# EAGLE board ZdrojII (EAGLE 4.01)
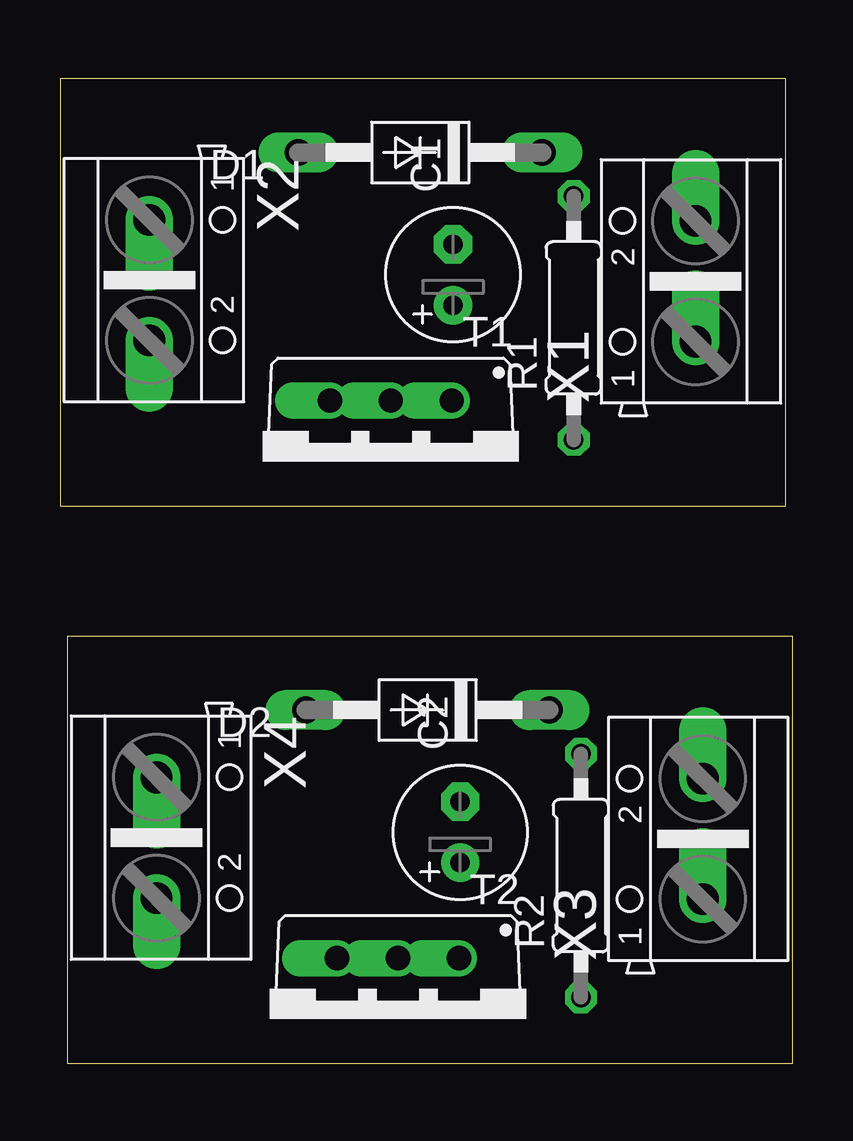
[diagram p0: board, top side]
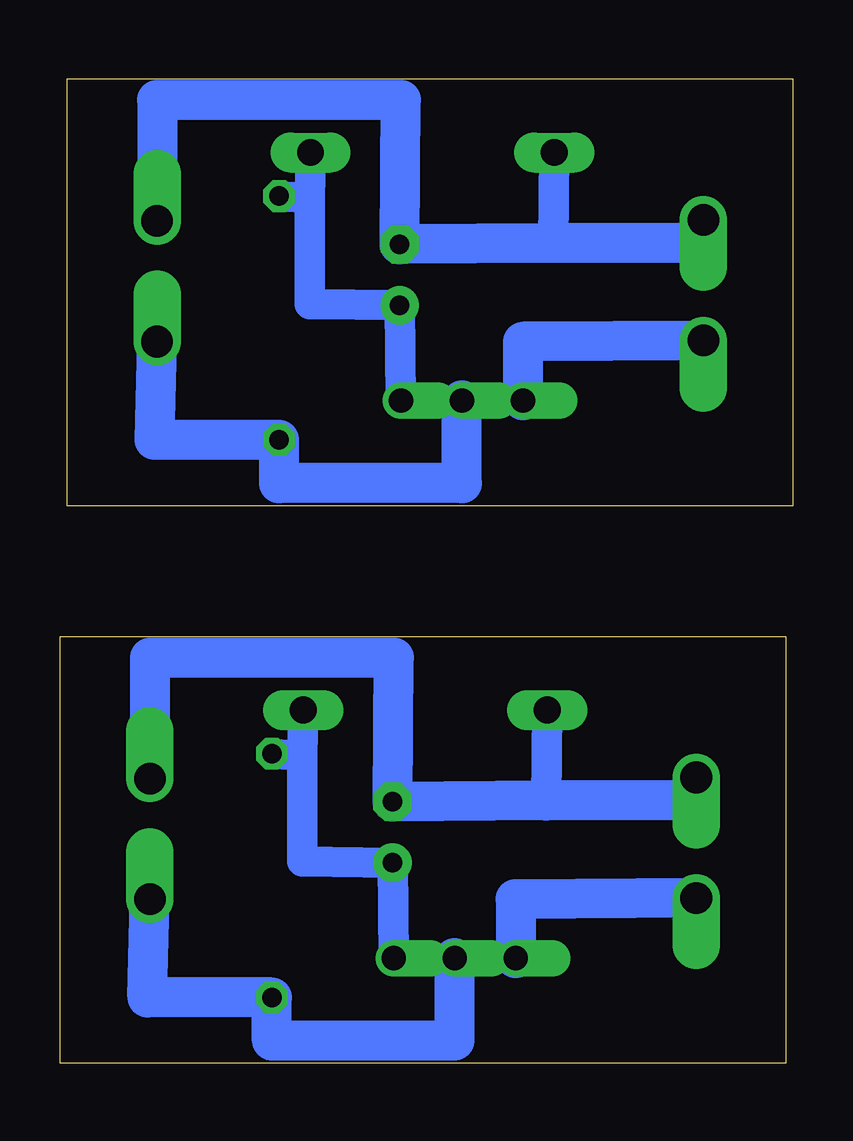
[diagram p1: board, bottom side, seen from below]

Size 30.53 x 41.05 mm. Coordinates in mm from the lower left corner, seen from the top.
Outline: 0,23.24 30.23,23.24 30.23,41.05 0,41.05 0,23.24
Outline: 0.3,0 30.53,0 30.53,17.81 0.3,17.81 0.3,0
Copper layers used: Bottom

## Footprints (pad centres in the part's own frame; a part is rotated, then mirrored left to right if it is on the bottom)
E2,5-6 = drill 0.813 pad 1.6 round: + -1.27,0 | drill 0.813 pad 1.6 octagon: - 1.27,0
DO41Z10 = drill 1.118 long: A 5.08,0; K -5.08,0
0207/10 = drill 0.813 octagon: 1 -5.08,0; 2 5.08,0
TO220V = drill 1.016 offset: 1 -2.54,-2.54; 2 0,-2.54; 3 2.54,-2.54
AK500/2 = drill 1.321 offset: 1 -2.515,0; 2 2.515,0

## Placement (x,y rotation side)
C1  [E2,5-6]  16.38,32.88 90 top
C2  [E2,5-6]  16.68,9.64 90 top
D1  BZX85  [DO41Z10]  15.01,37.98 180 top
D2  BZX85  [DO41Z10]  15.31,14.73 180 top
R1  [0207/10]  21.4,31.08 90 top
R2  [0207/10]  21.7,7.83 90 top
T1  TIP122*  [TO220V]  13.78,25.09 180 top
T2  TIP122*  [TO220V]  14.08,1.85 180 top
X1  [AK500/2]  26.48,32.6 90 top
X2  [AK500/2]  3.72,32.65 270 top
X3  [AK500/2]  26.78,9.36 90 top
X4  [AK500/2]  4.02,9.41 270 top

## Library data of the parts
C1 C2 R1 R2 = rcl
D1 D2 = diode
T1 T2 = transistor-npn
X1-X4 = con-ptr500

## Nets
N$1: T1.3 X2.2
N$2: R1.1 T1.2 X1.1
N$3: C1.- D1.A X1.2 X2.1
N$4: T2.3 X4.2
N$5: R2.1 T2.2 X3.1
N$6: C1.+ D1.K R1.2 T1.1
N$7: C2.- D2.A X3.2 X4.1
N$8: C2.+ D2.K R2.2 T2.1

## Tracks (layer width: path | path; a pad name or v marks a point on that pad's centre or on a via)
N$1
  Bottom 1.676: X2.2 11.24,30.09 T1.3
N$2
  Bottom 1.676: X1.1 26.59,26 R1.1 21.4,24.19 13.78,24.19 T1.2
N$3
  Bottom 1.27: 9.97,34.2 D1.A
  Bottom 1.676: X2.1 3.8,34.21 9.97,34.2 C1.- 16.32,40.15 26.48,40.15 X1.2
N$4
  Bottom 1.676: X4.2 11.54,6.85 T2.3
N$5
  Bottom 1.676: X3.1 26.89,2.75 R2.1 21.7,0.95 14.08,0.95 T2.2
N$6
  Bottom 1.27: T1.1 C1.+ 20.13,31.66 20.13,36.08 | 20.13,36.08 D1.K | 20.13,36.08 R1.2
N$7
  Bottom 1.27: 10.27,10.96 D2.A
  Bottom 1.676: X4.1 4.1,10.96 10.27,10.96 C2.- 16.62,16.91 26.78,16.91 X3.2
N$8
  Bottom 1.27: T2.1 C2.+ 20.43,8.42 20.43,12.84 | 20.43,12.84 D2.K | 20.43,12.84 R2.2